# Altium PCB Sexy Rodent.PcbDoc (part 2 of 3)
Units mm, origin at the board's own origin, x right, y up, seen from the top; angles counter-clockwise.
Board outline 59.05 x 84.85 mm, 2 copper layers (Top Layer, Bottom Layer); 67 components, 41 nets, 178 pads, 206 vias.
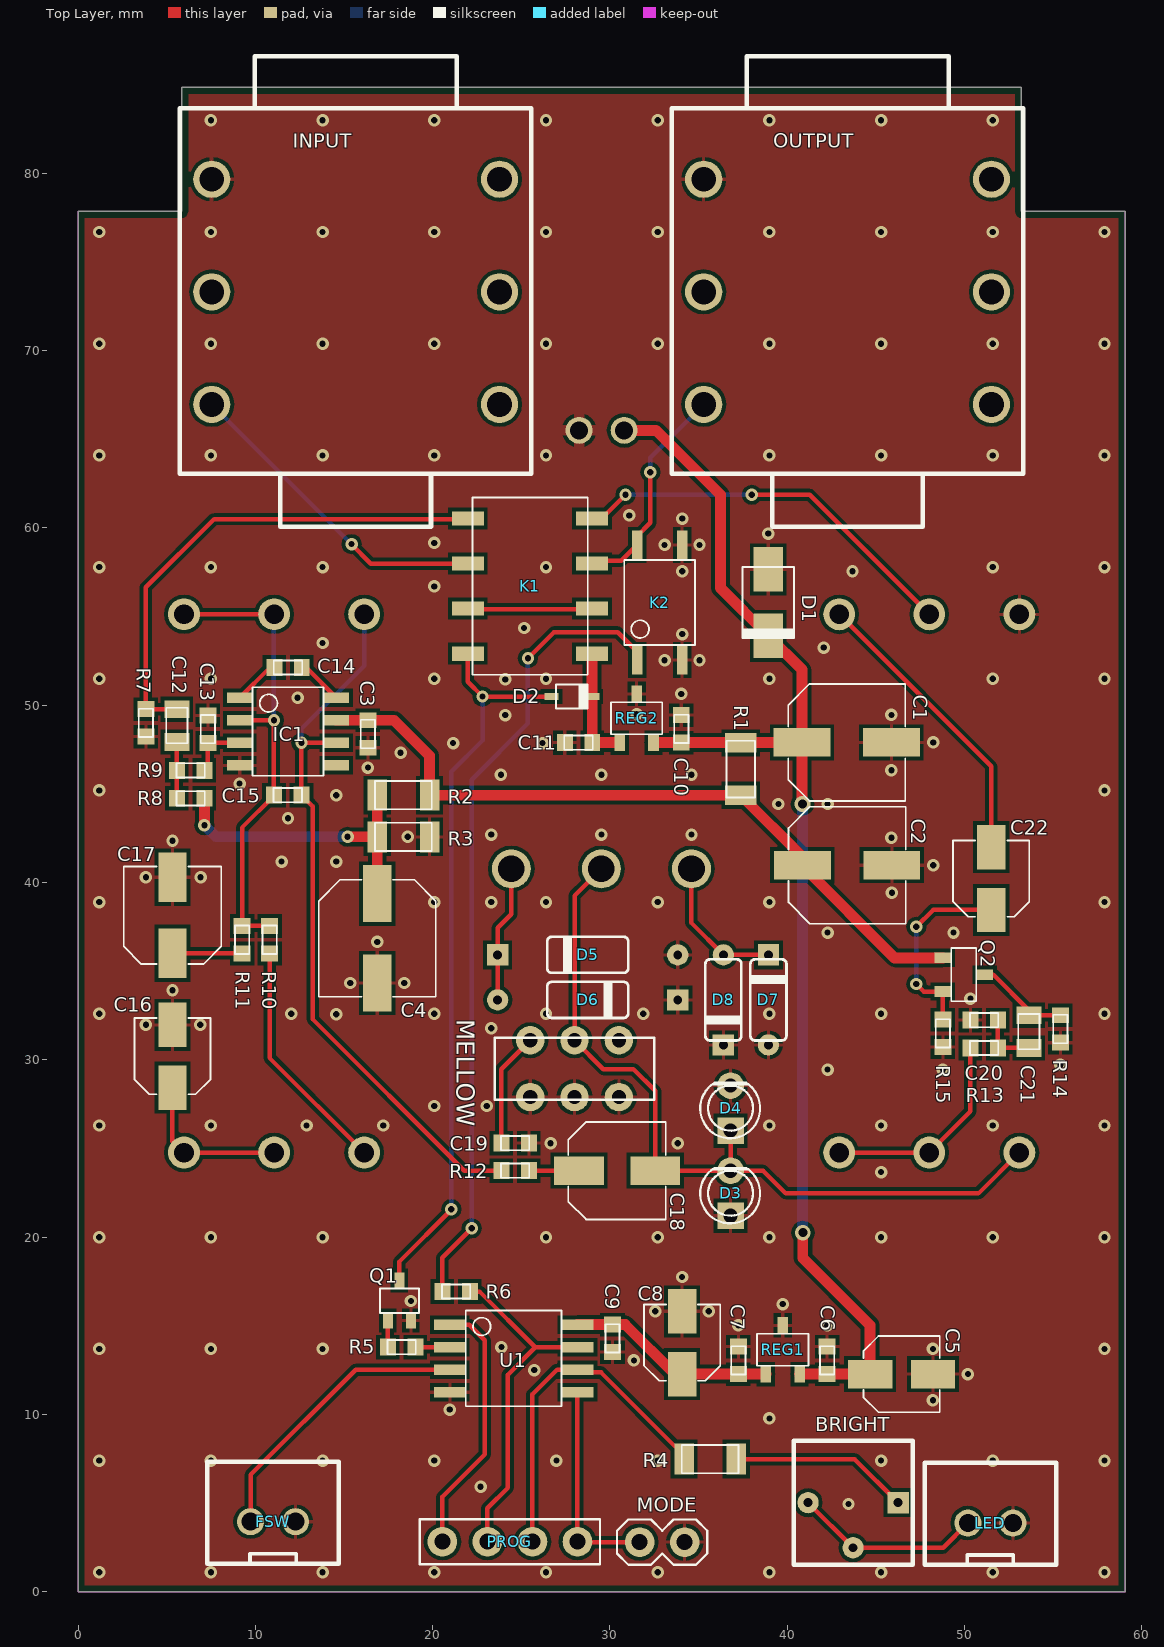
[diagram p0: Top Layer view]

## Part data (continued)
Q1: library part MMBT2222AWT1G, "TRANS NPN 40V 0.6A SOT323", Case/Package=SC, Collector Base Voltage (VCBO)=75V, Collector Emitter Breakdown Voltage=40V, Collector Emitter Saturation Voltage=1V, Current Rating=28A, Emitter Base Voltage (VEBO)=6V, Frequency=300MHz, Manufacturer="ON Semiconductor", Max Collector Current=600mA, Max Frequency=100MHz, Max Operating Temperature=150°C, Max Power Dissipation=150mW, Min Operating Temperature=-55°C, Package Quantity=1, Supplier Part Number 1=2317589, Collector Emitter Voltage (VCEO)=40V, ComponentLink1Description=https://datasheet.ciiva.com/15139/getdatasheetpartid-76779-15139056.pdf?src-supplier=Verical, ComponentLink1URL=https://datasheet.ciiva.com/15139/getdatasheetpartid-76779-15139056.pdf?src-supplier=Verical, ComponentLink2Description=https://datasheet.ciiva.com/4722/mmbt2222awt1-d-110211-4722257.pdf?src-supplier=Mouser, ComponentLink2URL=https://datasheet.ciiva.com/4722/mmbt2222awt1-d-110211-4722257.pdf?src-supplier=Mouser, ComponentLink3Description=https://datasheet.ciiva.com/16478/mmbt2222awt1-d-16478517.pdf?src-supplier=Avnet+Asia, ComponentLink3URL=https://datasheet.ciiva.com/16478/mmbt2222awt1-d-16478517.pdf?src-supplier=Avnet+Asia, ComponentLink4Description=https://datasheet.ciiva.com/11201/mmbt2222awt1-d-11201756.pdf?src-supplier=Avnet, ComponentLink4URL=https://datasheet.ciiva.com/11201/mmbt2222awt1-d-11201756.pdf?src-supplier=Avnet, ComponentLink5Description=https://datasheet.ciiva.com/16221/mmbt2222awt1-d-16221845.pdf?src-supplier=Future+Electronics, ComponentLink5URL=https://datasheet.ciiva.com/16221/mmbt2222awt1-d-16221845.pdf?src-supplier=Future+Electronics, ComponentLink6Description=https://datasheet.ciiva.com/7972/mmbt2222awt1-d-7972374.pdf?src-supplier=Element14, ComponentLink6URL=https://datasheet.ciiva.com/7972/mmbt2222awt1-d-7972374.pdf?src-supplier=Element14, ComponentLink7Description=https://datasheet.ciiva.com/22664/1708260-22664154.pdf?src-supplier=Element14, ComponentLink7URL=https://datasheet.ciiva.com/22664/1708260-22664154.pdf?src-supplier=Element14, ComponentLink8Description=https://datasheet.ciiva.com/976/mmbt2222awt1-d-976443.pdf?src-supplier=Digi-Key, ComponentLink8URL=https://datasheet.ciiva.com/976/mmbt2222awt1-d-976443.pdf?src-supplier=Digi-Key, Contact Plating=Tin, Element Configuration=Single, Gain Bandwidth Product=300MHz, Height=1mm, hFE Min=35, Lead Free="Lead Free", Length=2.2mm, Manufacturer Part Number=MMBT2222AWT1G, Max Breakdown Voltage=40V, Number of Elements=1, Number of Pins=3, Packaging="Tape and Reel", Polarity=NPN, Power Dissipation=150mW, Price=0.0413, Pricing="5=0.118, 50=0.114, 100=0.0413, 500=0.025, 1500=0.024 (EUR)", Radiation Hardening=No, REACH SVHC="No SVHC", RoHS=Yes, Stock=16918, Supplier 1=Farnell, Transition Frequency=300MHz, Voltage Rating (DC)=40V, Width=1.35mm
Q2: library part MMBFJ201, "JFET N-CH 40V 350MW SOT23", Breakdown Voltage=-40V, Case/Package=SOT-23, Continuous Drain Current (ID)=1mA, Current Rating=50mA, Drain to Source Voltage (Vdss)=40V, Manufacturer="ON Semiconductor / Fairchild", Max Operating Temperature=150°C, Max Power Dissipation=350mW, Min Operating Temperature=-55°C, Package Quantity=1, Supplier Part Number 1=2295758, ComponentLink1Description=https://datasheet.ciiva.com/960/mmbfj201-960915.pdf?src-supplier=Digi-Key, ComponentLink1URL=https://datasheet.ciiva.com/960/mmbfj201-960915.pdf?src-supplier=Digi-Key, ComponentLink2Description=https://datasheet.ciiva.com/1188/j201-1188339.pdf?src-supplier=Element14, ComponentLink2URL=https://datasheet.ciiva.com/1188/j201-1188339.pdf?src-supplier=Element14, ComponentLink3Description=https://datasheet.ciiva.com/960/mmbfj201-960916.pdf?src-supplier=Digi-Key, ComponentLink3URL=https://datasheet.ciiva.com/960/mmbfj201-960916.pdf?src-supplier=Digi-Key, ComponentLink4Description=https://datasheet.ciiva.com/1209/mmbfj201-1209636.pdf?src-supplier=Farnell, ComponentLink4URL=https://datasheet.ciiva.com/1209/mmbfj201-1209636.pdf?src-supplier=Farnell, ComponentLink5Description=https://datasheet.ciiva.com/960/mmbfj201-960917.pdf?src-supplier=Digi-Key, ComponentLink5URL=https://datasheet.ciiva.com/960/mmbfj201-960917.pdf?src-supplier=Digi-Key, ComponentLink6Description=https://datasheet.ciiva.com/8084/mmbfj201-8084197.pdf?src-supplier=Avnet, ComponentLink6URL=https://datasheet.ciiva.com/8084/mmbfj201-8084197.pdf?src-supplier=Avnet, ComponentLink7Description=https://datasheet.ciiva.com/8084/mmbfj201-8084198.pdf?src-supplier=Avnet, ComponentLink7URL=https://datasheet.ciiva.com/8084/mmbfj201-8084198.pdf?src-supplier=Avnet, ComponentLink8Description=https://datasheet.ciiva.com/4437/mmbfj201-196106-4437754.pdf?src-supplier=Mouser, ComponentLink8URL=https://datasheet.ciiva.com/4437/mmbfj201-196106-4437754.pdf?src-supplier=Mouser, ComponentLink9Description=https://datasheet.ciiva.com/15224/getdatasheetpartid-92710-15224267.pdf?src-supplier=Verical, ComponentLink9URL=https://datasheet.ciiva.com/15224/getdatasheetpartid-92710-15224267.pdf?src-supplier=Verical, ComponentLink10Description=https://datasheet.ciiva.com/26026/mmbfj201-26026604.pdf?src-supplier=Avnet+Europe, ComponentLink10URL=https://datasheet.ciiva.com/26026/mmbfj201-26026604.pdf?src-supplier=Avnet+Europe, ComponentLink11Description=https://datasheet.ciiva.com/16775/mmbfj201-16775887.pdf?src-supplier=Future+Electronics, ComponentLink11URL=https://datasheet.ciiva.com/16775/mmbfj201-16775887.pdf?src-supplier=Future+Electronics, Element Configuration=Single, Gate to Source Voltage (Vgs)=-40V, Height=0.93mm, Lead Free="Lead Free", Length=2.92mm, Manufacturer Part Number=MMBFJ201, Mount="Surface Mount", Number of Pins=3, Packaging="Tape and Reel", Power Dissipation=350mW, Pricing="5=0.271, 50=0.248, 100=0.134, 500=0.097, 1500=0.0905 (EUR)", Radiation Hardening=No, REACH SVHC="No SVHC", RoHS=Yes, Stock=814, Supplier 1=Farnell, Voltage Rating (DC)=40V, Weight=0.03g, Width=1.3mm
R1: library part CRCW120647R0FKEA, "RES SMD 47 OHM 1% 1/4W 1206", Case/Package=1206, Case Code (Metric)=3216, Manufacturer=Vishay, Max Operating Temperature=155°C, Max Power Dissipation=250mW, Min Operating Temperature=-55°C, Package Quantity=10, Supplier Part Number 1=1470017, Temperature Coefficient=100ppm/°C, Tolerance=1%, Voltage Rating=200V, Case Code (Imperial)=1206, ComponentLink1Description=https://datasheet.ciiva.com/11818/0900766b80d98b5e-11818252.pdf?src-supplier=RSComponents, ComponentLink1URL=https://datasheet.ciiva.com/11818/0900766b80d98b5e-11818252.pdf?src-supplier=RSComponents, ComponentLink2Description=https://datasheet.ciiva.com/2469/dcrcwe3-2469056.pdf?src-supplier=Digi-Key, ComponentLink2URL=https://datasheet.ciiva.com/2469/dcrcwe3-2469056.pdf?src-supplier=Digi-Key, ComponentLink3Description=https://datasheet.ciiva.com/16760/70201119-16760313.pdf?src-supplier=Allied+Electronics, ComponentLink3URL=https://datasheet.ciiva.com/16760/70201119-16760313.pdf?src-supplier=Allied+Electronics, ComponentLink4Description=https://datasheet.ciiva.com/9005/dcrcwe3-9005498.pdf?src-supplier=Avnet, ComponentLink4URL=https://datasheet.ciiva.com/9005/dcrcwe3-9005498.pdf?src-supplier=Avnet, ComponentLink5Description=https://datasheet.ciiva.com/2469/dcrcwe3-2469054.pdf?src-supplier=Digi-Key, ComponentLink5URL=https://datasheet.ciiva.com/2469/dcrcwe3-2469054.pdf?src-supplier=Digi-Key, ComponentLink6Description=https://datasheet.ciiva.com/9005/dcrcwe3-9005502.pdf?src-supplier=Avnet, ComponentLink6URL=https://datasheet.ciiva.com/9005/dcrcwe3-9005502.pdf?src-supplier=Avnet, ComponentLink7Description=https://datasheet.ciiva.com/16435/dcrcw-16435790.pdf?src-supplier=Future+Electronics, ComponentLink7URL=https://datasheet.ciiva.com/16435/dcrcw-16435790.pdf?src-supplier=Future+Electronics, ComponentLink8Description=https://datasheet.ciiva.com/16894/dcrcwe3-16894718.pdf?src-supplier=Avnet+Europe, ComponentLink8URL=https://datasheet.ciiva.com/16894/dcrcwe3-16894718.pdf?src-supplier=Avnet+Europe, ComponentLink9Description=https://datasheet.ciiva.com/7777/1697337-7777594.pdf?src-supplier=Element14, ComponentLink9URL=https://datasheet.ciiva.com/7777/1697337-7777594.pdf?src-supplier=Element14, ComponentLink10Description=https://datasheet.ciiva.com/15159/getdatasheetpartid-67741-15159676.pdf?src-supplier=Verical, ComponentLink10URL=https://datasheet.ciiva.com/15159/getdatasheetpartid-67741-15159676.pdf?src-supplier=Verical, ComponentLink11Description=https://datasheet.ciiva.com/2469/dcrcwe3-2469055.pdf?src-supplier=Digi-Key, ComponentLink11URL=https://datasheet.ciiva.com/2469/dcrcwe3-2469055.pdf?src-supplier=Digi-Key, Composition="Thick Film", Contact Plating=Tin, Depth=1.6mm, Features="Automotive AEC-Q200", Height=0.55mm, Lead Free="Lead Free", Length=3.2mm, Manufacturer Part Number=CRCW120647R0FKEA, Military Standard=Not, Mount="Surface Mount", Number of Terminations=2, Packaging="Tape and Reel", Power Rating=250mW, Price=0.0249, Pricing="10=0.0369, 100=0.0246, 500=0.0205, 1000=0.0135, 2500=0.0108 (EUR)", Radiation Hardening=No, REACH SVHC=Unknown, Resistance=47R, RoHS=Yes, Stock=90018, Supplier 1=Farnell, Termination=SMD/SMT, Voltage Rating (DC)=200V, Weight=0.000353oz, Width=0.063inch
R2 R3: library part CRCW1206100KFKEA, "RES SMD 100K OHM 1% 1/4W 1206", Case/Package=1206, Case Code (Metric)=3216, Manufacturer=Vishay, Max Operating Temperature=155°C, Max Power Dissipation=250mW, Min Operating Temperature=-55°C, Package Quantity=10, Resistance=100kR, Supplier Part Number 1=1469975, Temperature Coefficient=100ppm/°C, Tolerance=1%, Voltage Rating=200V, Case Code (Imperial)=1206, ComponentLink1Description=https://datasheet.ciiva.com/11810/0900766b80d98b5e-11810216.pdf?src-supplier=RSComponents, ComponentLink1URL=https://datasheet.ciiva.com/11810/0900766b80d98b5e-11810216.pdf?src-supplier=RSComponents, ComponentLink2Description=https://datasheet.ciiva.com/16761/70201119-16761385.pdf?src-supplier=Allied+Electronics, ComponentLink2URL=https://datasheet.ciiva.com/16761/70201119-16761385.pdf?src-supplier=Allied+Electronics, ComponentLink3Description=https://datasheet.ciiva.com/26316/fld-crcw-e3-data-en-26316474.pdf?src-supplier=Distrelec, ComponentLink3URL=https://datasheet.ciiva.com/26316/fld-crcw-e3-data-en-26316474.pdf?src-supplier=Distrelec, ComponentLink4Description=https://datasheet.ciiva.com/16514/dcrcwe3-16514731.pdf?src-supplier=Avnet+Asia, ComponentLink4URL=https://datasheet.ciiva.com/16514/dcrcwe3-16514731.pdf?src-supplier=Avnet+Asia, ComponentLink5Description=https://datasheet.ciiva.com/16773/70201119-16773804.pdf?src-supplier=Allied+Electronics, ComponentLink5URL=https://datasheet.ciiva.com/16773/70201119-16773804.pdf?src-supplier=Allied+Electronics, ComponentLink6Description=https://datasheet.ciiva.com/2468/dcrcwe3-2468653.pdf?src-supplier=Digi-Key, ComponentLink6URL=https://datasheet.ciiva.com/2468/dcrcwe3-2468653.pdf?src-supplier=Digi-Key, ComponentLink7Description=https://datasheet.ciiva.com/2468/dcrcwe3-2468654.pdf?src-supplier=Digi-Key, ComponentLink7URL=https://datasheet.ciiva.com/2468/dcrcwe3-2468654.pdf?src-supplier=Digi-Key, ComponentLink8Description=https://datasheet.ciiva.com/5551/dcrcwe3-109170-5551630.pdf?src-supplier=Mouser, ComponentLink8URL=https://datasheet.ciiva.com/5551/dcrcwe3-109170-5551630.pdf?src-supplier=Mouser, ComponentLink9Description=https://datasheet.ciiva.com/8979/dcrcwe3-8979854.pdf?src-supplier=Avnet, ComponentLink9URL=https://datasheet.ciiva.com/8979/dcrcwe3-8979854.pdf?src-supplier=Avnet, ComponentLink10Description=https://datasheet.ciiva.com/8979/dcrcwe3-8979855.pdf?src-supplier=Avnet, ComponentLink10URL=https://datasheet.ciiva.com/8979/dcrcwe3-8979855.pdf?src-supplier=Avnet, ComponentLink11Description=https://datasheet.ciiva.com/2468/dcrcwe3-2468652.pdf?src-supplier=Digi-Key, ComponentLink11URL=https://datasheet.ciiva.com/2468/dcrcwe3-2468652.pdf?src-supplier=Digi-Key, ComponentLink12Description=https://datasheet.ciiva.com/7777/1720486-7777612.pdf?src-supplier=Element14, ComponentLink12URL=https://datasheet.ciiva.com/7777/1720486-7777612.pdf?src-supplier=Element14, Composition="Thick Film", Contact Plating=Tin, Depth=1.6mm, Features="Automotive AEC-Q200", Height=0.55mm, Lead Free="Lead Free", Length=3.2mm, Manufacturer Part Number=CRCW1206100KFKEA, Military Standard=Not, Mount="Surface Mount", Number of Pins=2, Number of Terminations=2, Packaging="Tape and Reel", Power Rating=250mW, Price=0.0249, Pricing="10=0.0369, 100=0.0246, 500=0.0205, 1000=0.0135, 2500=0.0108 (EUR)", Radiation Hardening=No, REACH SVHC=Unknown, RoHS=Yes, Stock=99714, Supplier 1=Farnell, Termination=SMD/SMT, Voltage Rating (DC)=200V, Weight=0.000353oz, Width=0.063inch
R4: library part CRCW1206220RFKEA, "RES SMD 220 OHM 1% 1/4W 1206", Case/Package=1206, Case Code (Metric)=3216, Manufacturer=Vishay, Max Operating Temperature=155°C, Max Power Dissipation=250mW, Min Operating Temperature=-55°C, Package Quantity=10, Supplier Part Number 1=2139380, Temperature Coefficient=100ppm/°C, Tolerance=1%, Voltage Rating=200V, Case Code (Imperial)=1206, ComponentLink1Description=https://datasheet.ciiva.com/5550/dcrcwe3-109170-5550679.pdf?src-supplier=Mouser, ComponentLink1URL=https://datasheet.ciiva.com/5550/dcrcwe3-109170-5550679.pdf?src-supplier=Mouser, ComponentLink2Description=https://datasheet.ciiva.com/17166/dcrcwe3-17166378.pdf?src-supplier=Avnet+Europe, ComponentLink2URL=https://datasheet.ciiva.com/17166/dcrcwe3-17166378.pdf?src-supplier=Avnet+Europe, ComponentLink3Description=https://datasheet.ciiva.com/2515/dcrcwe3-2515580.pdf?src-supplier=Digi-Key, ComponentLink3URL=https://datasheet.ciiva.com/2515/dcrcwe3-2515580.pdf?src-supplier=Digi-Key, ComponentLink4Description=https://datasheet.ciiva.com/2515/dcrcwe3-2515581.pdf?src-supplier=Digi-Key, ComponentLink4URL=https://datasheet.ciiva.com/2515/dcrcwe3-2515581.pdf?src-supplier=Digi-Key, ComponentLink5Description=https://datasheet.ciiva.com/2515/dcrcwe3-2515582.pdf?src-supplier=Digi-Key, ComponentLink5URL=https://datasheet.ciiva.com/2515/dcrcwe3-2515582.pdf?src-supplier=Digi-Key, ComponentLink6Description=https://datasheet.ciiva.com/8957/dcrcwe3-8957438.pdf?src-supplier=Avnet, ComponentLink6URL=https://datasheet.ciiva.com/8957/dcrcwe3-8957438.pdf?src-supplier=Avnet, ComponentLink7Description=https://datasheet.ciiva.com/22700/1697337-22700367.pdf?src-supplier=Element14, ComponentLink7URL=https://datasheet.ciiva.com/22700/1697337-22700367.pdf?src-supplier=Element14, ComponentLink8Description=https://datasheet.ciiva.com/26317/fld-crcw-e3-data-en-26317129.pdf?src-supplier=Distrelec, ComponentLink8URL=https://datasheet.ciiva.com/26317/fld-crcw-e3-data-en-26317129.pdf?src-supplier=Distrelec, ComponentLink9Description=https://datasheet.ciiva.com/7800/dcrcwe3-7800651.pdf?src-supplier=Element14, ComponentLink9URL=https://datasheet.ciiva.com/7800/dcrcwe3-7800651.pdf?src-supplier=Element14, ComponentLink10Description=https://datasheet.ciiva.com/22675/1912744-22675103.pdf?src-supplier=Element14, ComponentLink10URL=https://datasheet.ciiva.com/22675/1912744-22675103.pdf?src-supplier=Element14, Composition="Thick Film", Contact Plating=Tin, Depth=1.6mm, Features="Automotive AEC-Q200", Height=0.55mm, Lead Free="Lead Free", Length=3.2mm, Manufacturer Part Number=CRCW1206220RFKEA, Military Standard=Not, Mount="Surface Mount", Number of Terminations=2, Packaging="Tape and Reel", Power Rating=250mW, Price=0.028, Pricing="10=0.0415, 100=0.0276, 500=0.0231, 1000=0.0135, 2500=0.0116 (EUR)", Radiation Hardening=No, REACH SVHC=Unknown, Resistance=220R, RoHS=Yes, Stock=47111, Supplier 1=Farnell, Termination=SMD/SMT, Voltage Rating (DC)=200V, Weight=0.000353oz, Width=1.6mm
R5: library part CRCW060320K0FKEA, "RES SMD 20K OHM 1% 1/10W 0603", Case/Package=0603, Case Code (Metric)=1608, Manufacturer=Vishay, Max Operating Temperature=155°C, Min Operating Temperature=-55°C, Package Quantity=5000, Power Rating=100mW, Resistance=20kR, Supplier Part Number 1=1469774, Temperature Coefficient=100ppm/°C, Tolerance=1%, Voltage Rating=75V, Case Code (Imperial)=0603, ComponentLink1Description=https://datasheet.ciiva.com/5549/dcrcwe3-109170-5549626.pdf?src-supplier=Mouser, ComponentLink1URL=https://datasheet.ciiva.com/5549/dcrcwe3-109170-5549626.pdf?src-supplier=Mouser, ComponentLink2Description=https://datasheet.ciiva.com/26314/fld-crcw-e3-data-en-26314665.pdf?src-supplier=Distrelec, ComponentLink2URL=https://datasheet.ciiva.com/26314/fld-crcw-e3-data-en-26314665.pdf?src-supplier=Distrelec, ComponentLink3Description=https://datasheet.ciiva.com/3257/dcrcwe3-3257238.pdf?src-supplier=Avnet, ComponentLink3URL=https://datasheet.ciiva.com/3257/dcrcwe3-3257238.pdf?src-supplier=Avnet, ComponentLink4Description=https://datasheet.ciiva.com/7841/1697337-7841574.pdf?src-supplier=Element14, ComponentLink4URL=https://datasheet.ciiva.com/7841/1697337-7841574.pdf?src-supplier=Element14, ComponentLink5Description=https://datasheet.ciiva.com/3257/dcrcwe3-3257239.pdf?src-supplier=Avnet, ComponentLink5URL=https://datasheet.ciiva.com/3257/dcrcwe3-3257239.pdf?src-supplier=Avnet, ComponentLink6Description=https://datasheet.ciiva.com/16351/dcrcwe3-16351112.pdf?src-supplier=Future+Electronics, ComponentLink6URL=https://datasheet.ciiva.com/16351/dcrcwe3-16351112.pdf?src-supplier=Future+Electronics, ComponentLink7Description=https://datasheet.ciiva.com/16893/dcrcw-16893852.pdf?src-supplier=Avnet+Europe, ComponentLink7URL=https://datasheet.ciiva.com/16893/dcrcw-16893852.pdf?src-supplier=Avnet+Europe, Composition="Thick Film", Contact Plating=Tin, Depth=0.85mm, Height=0.45mm, Lead Free="Lead Free", Length=1.55mm, Manufacturer Part Number=CRCW060320K0FKEA, Military Standard=Not, Mount="Surface Mount", Number of Pins=2, Packaging="Tape and Reel", Price=0.0131, Pricing="10=0.0169, 100=0.013, 500=0.0113, 1000=0.008 (EUR)", Radiation Hardening=No, REACH SVHC=Unknown, RoHS=Yes, Stock=71220, Supplier 1=Farnell, Termination=SMD/SMT, Voltage Rating (DC)=75V, Weight=7.1E-05oz, Width=0.85mm
R6 R9 R12: library part CRCW06031K00FKEA, "RES SMD 1K OHM 1% 1/10W 0603", Case/Package=0603, Case Code (Metric)=1608, Manufacturer="Vishay Dale", Max Operating Temperature=155°C, Max Power Dissipation=100mW, Min Operating Temperature=-55°C, Package Quantity=10, Resistance=1kR, Supplier Part Number 1=1469740, Temperature Coefficient=100ppm/°C, Tolerance=1%, Voltage Rating=75V, Case Code (Imperial)=0603, ComponentLink1Description=https://datasheet.ciiva.com/11808/0900766b80d98afc-11808625.pdf?src-supplier=RSComponents, ComponentLink1URL=https://datasheet.ciiva.com/11808/0900766b80d98afc-11808625.pdf?src-supplier=RSComponents, ComponentLink2Description=https://datasheet.ciiva.com/2465/dcrcwe3-2465536.pdf?src-supplier=Digi-Key, ComponentLink2URL=https://datasheet.ciiva.com/2465/dcrcwe3-2465536.pdf?src-supplier=Digi-Key, ComponentLink3Description=https://datasheet.ciiva.com/8336/dcrcwe3-8336822.pdf?src-supplier=Avnet, ComponentLink3URL=https://datasheet.ciiva.com/8336/dcrcwe3-8336822.pdf?src-supplier=Avnet, ComponentLink4Description=https://datasheet.ciiva.com/16515/dcrcwe3-16515078.pdf?src-supplier=Avnet+Asia, ComponentLink4URL=https://datasheet.ciiva.com/16515/dcrcwe3-16515078.pdf?src-supplier=Avnet+Asia, ComponentLink5Description=https://datasheet.ciiva.com/46441/1720486-46441622.pdf?src-supplier=Element14, ComponentLink5URL=https://datasheet.ciiva.com/46441/1720486-46441622.pdf?src-supplier=Element14, ComponentLink6Description=https://datasheet.ciiva.com/26316/fld-crcw-e3-data-en-26316551.pdf?src-supplier=Distrelec, ComponentLink6URL=https://datasheet.ciiva.com/26316/fld-crcw-e3-data-en-26316551.pdf?src-supplier=Distrelec, ComponentLink7Description=https://datasheet.ciiva.com/46441/1720486-46441623.pdf?src-supplier=Element14, ComponentLink7URL=https://datasheet.ciiva.com/46441/1720486-46441623.pdf?src-supplier=Element14, ComponentLink8Description=https://datasheet.ciiva.com/46385/1697337-46385497.pdf?src-supplier=Element14, ComponentLink8URL=https://datasheet.ciiva.com/46385/1697337-46385497.pdf?src-supplier=Element14, ComponentLink9Description=https://datasheet.ciiva.com/3257/dcrcwe3-3257132.pdf?src-supplier=Avnet, ComponentLink9URL=https://datasheet.ciiva.com/3257/dcrcwe3-3257132.pdf?src-supplier=Avnet, ComponentLink10Description=https://datasheet.ciiva.com/16199/dcrcwe3-16199053.pdf?src-supplier=Future+Electronics, ComponentLink10URL=https://datasheet.ciiva.com/16199/dcrcwe3-16199053.pdf?src-supplier=Future+Electronics, ComponentLink11Description=https://datasheet.ciiva.com/2465/dcrcwe3-2465534.pdf?src-supplier=Digi-Key, ComponentLink11URL=https://datasheet.ciiva.com/2465/dcrcwe3-2465534.pdf?src-supplier=Digi-Key, ComponentLink12Description=https://datasheet.ciiva.com/16893/dcrcwe3-16893742.pdf?src-supplier=Avnet+Europe, ComponentLink12URL=https://datasheet.ciiva.com/16893/dcrcwe3-16893742.pdf?src-supplier=Avnet+Europe, ComponentLink13Description=https://datasheet.ciiva.com/2465/dcrcwe3-2465535.pdf?src-supplier=Digi-Key, ComponentLink13URL=https://datasheet.ciiva.com/2465/dcrcwe3-2465535.pdf?src-supplier=Digi-Key, Composition="Thick Film", Contact Plating=Tin, Depth=0.85mm, Features="Automotive AEC-Q200", Height=0.45mm, Lead Free="Lead Free", Length=1.55mm, Manufacturer Part Number=CRCW06031K00FKEA, Military Standard=Not, Mount="Surface Mount", Number of Pins=2, Number of Terminations=2, Packaging="Tape and Reel", Power Rating=100mW, Price=0.013, Pricing="10=0.017, 100=0.0131, 500=0.0114, 1000=0.008, 2500=0.0061 (EUR)", Radiation Hardening=No, REACH SVHC=Unknown, RoHS=Yes, Stock=1083345, Supplier 1=Farnell, Termination=SMD/SMT, Voltage Rating (DC)=75V, Weight=7.1E-05oz, Width=0.033inch
R7 R8: library part CRCW06032M20FKEA, "RES SMD 2.2M OHM 1% 1/10W 0603", Case/Package=0603, Case Code (Metric)=1608, Manufacturer=Vishay, Max Operating Temperature=155°C, Max Power Dissipation=100mW, Min Operating Temperature=-55°C, Package Quantity=10, Resistance=2.2MR, Supplier Part Number 1=2138646, Temperature Coefficient=100ppm/°C, Tolerance=1%, Voltage Rating=75V, Case Code (Imperial)=0603, ComponentLink1Description=https://datasheet.ciiva.com/11810/0900766b80d98afc-11810588.pdf?src-supplier=RSComponents, ComponentLink1URL=https://datasheet.ciiva.com/11810/0900766b80d98afc-11810588.pdf?src-supplier=RSComponents, ComponentLink2Description=https://datasheet.ciiva.com/2466/dcrcwe3-2466118.pdf?src-supplier=Digi-Key, ComponentLink2URL=https://datasheet.ciiva.com/2466/dcrcwe3-2466118.pdf?src-supplier=Digi-Key, ComponentLink3Description=https://datasheet.ciiva.com/22682/1912744-22682662.pdf?src-supplier=Element14, ComponentLink3URL=https://datasheet.ciiva.com/22682/1912744-22682662.pdf?src-supplier=Element14, ComponentLink4Description=https://datasheet.ciiva.com/7801/1697337-7801067.pdf?src-supplier=Element14, ComponentLink4URL=https://datasheet.ciiva.com/7801/1697337-7801067.pdf?src-supplier=Element14, ComponentLink5Description=https://datasheet.ciiva.com/22869/70201119-22869819.pdf?src-supplier=Allied+Electronics, ComponentLink5URL=https://datasheet.ciiva.com/22869/70201119-22869819.pdf?src-supplier=Allied+Electronics, ComponentLink6Description=https://datasheet.ciiva.com/26314/fld-crcw-e3-data-en-26314653.pdf?src-supplier=Distrelec, ComponentLink6URL=https://datasheet.ciiva.com/26314/fld-crcw-e3-data-en-26314653.pdf?src-supplier=Distrelec, ComponentLink7Description=https://datasheet.ciiva.com/3257/dcrcwe3-3257407.pdf?src-supplier=Avnet, ComponentLink7URL=https://datasheet.ciiva.com/3257/dcrcwe3-3257407.pdf?src-supplier=Avnet, ComponentLink8Description=https://datasheet.ciiva.com/2466/dcrcwe3-2466116.pdf?src-supplier=Digi-Key, ComponentLink8URL=https://datasheet.ciiva.com/2466/dcrcwe3-2466116.pdf?src-supplier=Digi-Key, ComponentLink9Description=https://datasheet.ciiva.com/2466/dcrcwe3-2466117.pdf?src-supplier=Digi-Key, ComponentLink9URL=https://datasheet.ciiva.com/2466/dcrcwe3-2466117.pdf?src-supplier=Digi-Key, ComponentLink10Description=https://datasheet.ciiva.com/16498/dcrcwe3-16498313.pdf?src-supplier=Future+Electronics, ComponentLink10URL=https://datasheet.ciiva.com/16498/dcrcwe3-16498313.pdf?src-supplier=Future+Electronics, ComponentLink11Description=https://datasheet.ciiva.com/7801/1697337-7801066.pdf?src-supplier=Element14, ComponentLink11URL=https://datasheet.ciiva.com/7801/1697337-7801066.pdf?src-supplier=Element14, Composition="Thick Film", Contact Plating=Tin, Depth=0.85mm, Features="Automotive AEC-Q200", Height=0.45mm, Lead Free="Lead Free", Length=1.55mm, Manufacturer Part Number=CRCW06032M20FKEA, Military Standard=Not, Mount="Surface Mount", Number of Pins=2, Number of Terminations=2, Packaging="Tape and Reel", Power Rating=100mW, Price=0.0165, Pricing="10=0.0212, 100=0.0163, 500=0.0141, 1000=0.0073 (EUR)", Radiation Hardening=No, REACH SVHC=Unknown, RoHS=Yes, Stock=19125, Supplier 1=Farnell, Termination=SMD/SMT, Voltage Rating (DC)=75V, Weight=7.1E-05oz, Width=0.85mm
R10: library part CRCW060347R0FKEA, "RES SMD 47 OHM 1% 1/10W 0603", Case/Package=0603, Case Code (Metric)=1608, Manufacturer=Vishay, Max Operating Temperature=155°C, Max Power Dissipation=100mW, Min Operating Temperature=-55°C, Package Quantity=10, Supplier Part Number 1=2141241, Temperature Coefficient=100ppm/°C, Tolerance=1%, Voltage Rating=75V, Case Code (Imperial)=0603, ComponentLink1Description=https://datasheet.ciiva.com/11810/0900766b80d98afc-11810171.pdf?src-supplier=RSComponents, ComponentLink1URL=https://datasheet.ciiva.com/11810/0900766b80d98afc-11810171.pdf?src-supplier=RSComponents, ComponentLink2Description=https://datasheet.ciiva.com/3257/dcrcwe3-3257637.pdf?src-supplier=Avnet, ComponentLink2URL=https://datasheet.ciiva.com/3257/dcrcwe3-3257637.pdf?src-supplier=Avnet, ComponentLink3Description=https://datasheet.ciiva.com/7777/1697337-7777333.pdf?src-supplier=Element14, ComponentLink3URL=https://datasheet.ciiva.com/7777/1697337-7777333.pdf?src-supplier=Element14, ComponentLink4Description=https://datasheet.ciiva.com/22872/70201119-22872069.pdf?src-supplier=Allied+Electronics, ComponentLink4URL=https://datasheet.ciiva.com/22872/70201119-22872069.pdf?src-supplier=Allied+Electronics, ComponentLink5Description=https://datasheet.ciiva.com/2465/dcrcwe3-2465675.pdf?src-supplier=Digi-Key, ComponentLink5URL=https://datasheet.ciiva.com/2465/dcrcwe3-2465675.pdf?src-supplier=Digi-Key, ComponentLink6Description=https://datasheet.ciiva.com/2465/dcrcwe3-2465676.pdf?src-supplier=Digi-Key, ComponentLink6URL=https://datasheet.ciiva.com/2465/dcrcwe3-2465676.pdf?src-supplier=Digi-Key, ComponentLink7Description=https://datasheet.ciiva.com/5549/dcrcwe3-109170-5549100.pdf?src-supplier=Mouser, ComponentLink7URL=https://datasheet.ciiva.com/5549/dcrcwe3-109170-5549100.pdf?src-supplier=Mouser, ComponentLink8Description=https://datasheet.ciiva.com/7777/1697337-7777334.pdf?src-supplier=Element14, ComponentLink8URL=https://datasheet.ciiva.com/7777/1697337-7777334.pdf?src-supplier=Element14, ComponentLink9Description=https://datasheet.ciiva.com/16777/70201119-16777404.pdf?src-supplier=Allied+Electronics, ComponentLink9URL=https://datasheet.ciiva.com/16777/70201119-16777404.pdf?src-supplier=Allied+Electronics, ComponentLink10Description=https://datasheet.ciiva.com/22700/1697337-22700364.pdf?src-supplier=Element14, ComponentLink10URL=https://datasheet.ciiva.com/22700/1697337-22700364.pdf?src-supplier=Element14, ComponentLink11Description=https://datasheet.ciiva.com/2465/dcrcwe3-2465677.pdf?src-supplier=Digi-Key, ComponentLink11URL=https://datasheet.ciiva.com/2465/dcrcwe3-2465677.pdf?src-supplier=Digi-Key, ComponentLink12Description=https://datasheet.ciiva.com/26316/fld-crcw-e3-data-en-26316558.pdf?src-supplier=Distrelec, ComponentLink12URL=https://datasheet.ciiva.com/26316/fld-crcw-e3-data-en-26316558.pdf?src-supplier=Distrelec, Composition="Thick Film", Contact Plating=Tin, Depth=0.85mm, Features="Automotive AEC-Q200", Height=0.45mm, Lead Free="Lead Free", Length=1.55mm, Manufacturer Part Number=CRCW060347R0FKEA, Military Standard=Not, Mount="Surface Mount", Number of Pins=2, Number of Terminations=2, Packaging="Tape and Reel", Power Rating=100mW, Price=0.0128, Pricing="10=0.0169, 100=0.013, 500=0.0113, 1000=0.0074 (EUR)", Radiation Hardening=No, REACH SVHC=Unknown, Resistance=47R, RoHS=Yes, Stock=39123, Supplier 1=Farnell, Termination=SMD/SMT, Voltage Rating (DC)=75V, Weight=7.1E-05oz, Width=0.033inch
R11: library part CRCW0603560RFKEA, "RES SMD 560 OHM 1% 1/10W 0603", Case/Package=0603, Case Code (Metric)=1608, Manufacturer=Vishay, Max Operating Temperature=155°C, Max Power Dissipation=100mW, Min Operating Temperature=-55°C, Package Quantity=5000, Supplier Part Number 1=1469828, Temperature Coefficient=100ppm/°C, Tolerance=1%, Voltage Rating=75V, Case Code (Imperial)=0603, ComponentLink1Description=https://datasheet.ciiva.com/11809/0900766b80d98afc-11809740.pdf?src-supplier=RSComponents, ComponentLink1URL=https://datasheet.ciiva.com/11809/0900766b80d98afc-11809740.pdf?src-supplier=RSComponents, ComponentLink2Description=https://datasheet.ciiva.com/2465/dcrcwe3-2465987.pdf?src-supplier=Digi-Key, ComponentLink2URL=https://datasheet.ciiva.com/2465/dcrcwe3-2465987.pdf?src-supplier=Digi-Key, ComponentLink3Description=https://datasheet.ciiva.com/2465/dcrcwe3-2465988.pdf?src-supplier=Digi-Key, ComponentLink3URL=https://datasheet.ciiva.com/2465/dcrcwe3-2465988.pdf?src-supplier=Digi-Key, ComponentLink4Description=https://datasheet.ciiva.com/2465/dcrcwe3-2465989.pdf?src-supplier=Digi-Key, ComponentLink4URL=https://datasheet.ciiva.com/2465/dcrcwe3-2465989.pdf?src-supplier=Digi-Key, ComponentLink5Description=https://datasheet.ciiva.com/16884/dcrcwe3-16884725.pdf?src-supplier=Avnet+Europe, ComponentLink5URL=https://datasheet.ciiva.com/16884/dcrcwe3-16884725.pdf?src-supplier=Avnet+Europe, ComponentLink6Description=https://datasheet.ciiva.com/22868/70201119-22868967.pdf?src-supplier=Allied+Electronics, ComponentLink6URL=https://datasheet.ciiva.com/22868/70201119-22868967.pdf?src-supplier=Allied+Electronics, ComponentLink7Description=https://datasheet.ciiva.com/7673/1697337-7673147.pdf?src-supplier=Element14, ComponentLink7URL=https://datasheet.ciiva.com/7673/1697337-7673147.pdf?src-supplier=Element14, ComponentLink8Description=https://datasheet.ciiva.com/5543/dcrcwe3-109170-5543470.pdf?src-supplier=Mouser, ComponentLink8URL=https://datasheet.ciiva.com/5543/dcrcwe3-109170-5543470.pdf?src-supplier=Mouser, ComponentLink9Description=https://datasheet.ciiva.com/3257/dcrcwe3-3257727.pdf?src-supplier=Avnet, ComponentLink9URL=https://datasheet.ciiva.com/3257/dcrcwe3-3257727.pdf?src-supplier=Avnet, ComponentLink10Description=https://datasheet.ciiva.com/7672/1697337-7672911.pdf?src-supplier=Element14, ComponentLink10URL=https://datasheet.ciiva.com/7672/1697337-7672911.pdf?src-supplier=Element14, Composition="Thick Film", Contact Plating=Tin, Depth=0.85mm, Features="Automotive AEC-Q200", Height=0.45mm, Lead Free="Lead Free", Length=1.55mm, Manufacturer Part Number=CRCW0603560RFKEA, Military Standard=Not, Mount="Surface Mount", Number of Pins=2, Number of Terminations=2, Packaging="Tape and Reel", Power Rating=100mW, Price=0.0093, Pricing="10=0.0112, 100=0.0092, 500=0.0084, 1000=0.0075 (EUR)", Radiation Hardening=No, REACH SVHC=Unknown, Resistance=560R, RoHS=Yes, Stock=54378, Supplier 1=Farnell, Termination=SMD/SMT, Voltage Rating (DC)=75V, Weight=7.1E-05oz, Width=0.033inch
R13: library part CRCW06031K50FKEA, "RES SMD 1.5K OHM 1% 1/10W 0603", Case/Package=0603, Case Code (Metric)=1608, Manufacturer=Vishay, Max Operating Temperature=155°C, Max Power Dissipation=100mW, Min Operating Temperature=-55°C, Package Quantity=10, Resistance=1.5kR, Supplier Part Number 1=1469743, Temperature Coefficient=100ppm/°C, Tolerance=1%, Voltage Rating=75V, Case Code (Imperial)=0603, ComponentLink1Description=https://datasheet.ciiva.com/11818/0900766b80d98afc-11818140.pdf?src-supplier=RSComponents, ComponentLink1URL=https://datasheet.ciiva.com/11818/0900766b80d98afc-11818140.pdf?src-supplier=RSComponents, ComponentLink2Description=https://datasheet.ciiva.com/2465/dcrcwe3-2465520.pdf?src-supplier=Digi-Key, ComponentLink2URL=https://datasheet.ciiva.com/2465/dcrcwe3-2465520.pdf?src-supplier=Digi-Key, ComponentLink3Description=https://datasheet.ciiva.com/16724/70201119-16724086.pdf?src-supplier=Allied+Electronics, ComponentLink3URL=https://datasheet.ciiva.com/16724/70201119-16724086.pdf?src-supplier=Allied+Electronics, ComponentLink4Description=https://datasheet.ciiva.com/16883/dcrcwe3-16883174.pdf?src-supplier=Avnet+Europe, ComponentLink4URL=https://datasheet.ciiva.com/16883/dcrcwe3-16883174.pdf?src-supplier=Avnet+Europe, ComponentLink5Description=https://datasheet.ciiva.com/5544/dcrcwe3-109170-5544539.pdf?src-supplier=Mouser, ComponentLink5URL=https://datasheet.ciiva.com/5544/dcrcwe3-109170-5544539.pdf?src-supplier=Mouser, ComponentLink6Description=https://datasheet.ciiva.com/7777/1720486-7777550.pdf?src-supplier=Element14, ComponentLink6URL=https://datasheet.ciiva.com/7777/1720486-7777550.pdf?src-supplier=Element14, ComponentLink7Description=https://datasheet.ciiva.com/2465/dcrcwe3-2465519.pdf?src-supplier=Digi-Key, ComponentLink7URL=https://datasheet.ciiva.com/2465/dcrcwe3-2465519.pdf?src-supplier=Digi-Key, ComponentLink8Description=https://datasheet.ciiva.com/2465/dcrcwe3-2465521.pdf?src-supplier=Digi-Key, ComponentLink8URL=https://datasheet.ciiva.com/2465/dcrcwe3-2465521.pdf?src-supplier=Digi-Key, ComponentLink9Description=https://datasheet.ciiva.com/16199/dcrcwe3-16199429.pdf?src-supplier=Future+Electronics, ComponentLink9URL=https://datasheet.ciiva.com/16199/dcrcwe3-16199429.pdf?src-supplier=Future+Electronics, ComponentLink10Description=https://datasheet.ciiva.com/26316/fld-crcw-e3-data-en-26316555.pdf?src-supplier=Distrelec, ComponentLink10URL=https://datasheet.ciiva.com/26316/fld-crcw-e3-data-en-26316555.pdf?src-supplier=Distrelec, Composition="Thick Film", Contact Plating=Tin, Depth=0.85mm, Features="Automotive AEC-Q200", Height=0.45mm, Lead Free="Lead Free", Length=1.55mm, Manufacturer Part Number=CRCW06031K50FKEA, Military Standard=Not, Mount="Surface Mount", Number of Terminations=2, Packaging="Tape and Reel", Power Rating=100mW, Price=0.0129, Pricing="10=0.017, 100=0.0131, 500=0.0114, 1000=0.008 (EUR)", REACH SVHC=Unknown, RoHS=Yes, Stock=115131, Supplier 1=Farnell, Termination=SMD/SMT, Voltage Rating (DC)=75V, Weight=7.1E-05oz, Width=0.033inch, Working Voltage=75V
R14: library part CRCW06031M00FKEA, "RES SMD 1M OHM 1% 1/10W 0603", Case/Package=0603, Case Code (Metric)=1608, Manufacturer=Vishay, Max Operating Temperature=155°C, Max Power Dissipation=100mW, Min Operating Temperature=-55°C, Package Quantity=10, Resistance=1MR, Supplier Part Number 1=1469746, Temperature Coefficient=100ppm/°C, Tolerance=1%, Voltage Rating=75V, Case Code (Imperial)=0603, ComponentLink1Description=https://datasheet.ciiva.com/11809/0900766b80d98afc-11809074.pdf?src-supplier=RSComponents, ComponentLink1URL=https://datasheet.ciiva.com/11809/0900766b80d98afc-11809074.pdf?src-supplier=RSComponents, ComponentLink2Description=https://datasheet.ciiva.com/26314/fld-crcw-e3-data-en-26314645.pdf?src-supplier=Distrelec, ComponentLink2URL=https://datasheet.ciiva.com/26314/fld-crcw-e3-data-en-26314645.pdf?src-supplier=Distrelec, ComponentLink3Description=https://datasheet.ciiva.com/2465/dcrcwe3-2465549.pdf?src-supplier=Digi-Key, ComponentLink3URL=https://datasheet.ciiva.com/2465/dcrcwe3-2465549.pdf?src-supplier=Digi-Key, ComponentLink4Description=https://datasheet.ciiva.com/16311/dcrcwe3-16311533.pdf?src-supplier=Future+Electronics, ComponentLink4URL=https://datasheet.ciiva.com/16311/dcrcwe3-16311533.pdf?src-supplier=Future+Electronics, ComponentLink5Description=https://datasheet.ciiva.com/2465/dcrcwe3-2465550.pdf?src-supplier=Digi-Key, ComponentLink5URL=https://datasheet.ciiva.com/2465/dcrcwe3-2465550.pdf?src-supplier=Digi-Key, ComponentLink6Description=https://datasheet.ciiva.com/7841/1720486-7841822.pdf?src-supplier=Element14, ComponentLink6URL=https://datasheet.ciiva.com/7841/1720486-7841822.pdf?src-supplier=Element14, ComponentLink7Description=https://datasheet.ciiva.com/2465/dcrcwe3-2465551.pdf?src-supplier=Digi-Key, ComponentLink7URL=https://datasheet.ciiva.com/2465/dcrcwe3-2465551.pdf?src-supplier=Digi-Key, ComponentLink8Description=https://datasheet.ciiva.com/7841/125364-7841823.pdf?src-supplier=Element14, ComponentLink8URL=https://datasheet.ciiva.com/7841/125364-7841823.pdf?src-supplier=Element14, Composition="Thick Film", Contact Plating=Tin, Depth=0.85mm, Features="Automotive AEC-Q200", Height=0.45mm, Lead Free="Lead Free", Length=1.55mm, Manufacturer Part Number=CRCW06031M00FKEA, Military Standard=Not, Mount="Surface Mount", Number of Pins=2, Number of Terminations=2, Packaging="Tape and Reel", Power Rating=100mW, Price=0.0131, Pricing="10=0.0169, 100=0.013, 500=0.0113, 1000=0.008 (EUR)", Radiation Hardening=No, REACH SVHC=Unknown, RoHS=Yes, Stock=118520, Supplier 1=Farnell, Termination=SMD/SMT, Voltage Rating (DC)=75V, Weight=7.1E-05oz, Width=0.85mm
R15: library part CRCW060310K0FKEA, "RES SMD 10K OHM 1% 1/10W 0603", Case/Package=0603, Case Code (Metric)=1608, Manufacturer=Vishay, Max Operating Temperature=155°C, Max Power Dissipation=100mW, Min Operating Temperature=-55°C, Package Quantity=10, Resistance=10kR, Supplier Part Number 1=1469748, Temperature Coefficient=100ppm/°C, Tolerance=1%, Voltage Rating=75V, Case Code (Imperial)=0603, ComponentLink1Description=https://datasheet.ciiva.com/11809/0900766b80d98afc-11809037.pdf?src-supplier=RSComponents, ComponentLink1URL=https://datasheet.ciiva.com/11809/0900766b80d98afc-11809037.pdf?src-supplier=RSComponents, ComponentLink2Description=https://datasheet.ciiva.com/16886/dcrcw-16886037.pdf?src-supplier=Avnet+Europe, ComponentLink2URL=https://datasheet.ciiva.com/16886/dcrcw-16886037.pdf?src-supplier=Avnet+Europe, ComponentLink3Description=https://datasheet.ciiva.com/26821/getdatasheetpartid-86831-26821109.pdf?src-supplier=Verical, ComponentLink3URL=https://datasheet.ciiva.com/26821/getdatasheetpartid-86831-26821109.pdf?src-supplier=Verical, ComponentLink4Description=https://datasheet.ciiva.com/16754/70201119-16754710.pdf?src-supplier=Allied+Electronics, ComponentLink4URL=https://datasheet.ciiva.com/16754/70201119-16754710.pdf?src-supplier=Allied+Electronics, ComponentLink5Description=https://datasheet.ciiva.com/16719/70201119-16719704.pdf?src-supplier=Allied+Electronics, ComponentLink5URL=https://datasheet.ciiva.com/16719/70201119-16719704.pdf?src-supplier=Allied+Electronics, ComponentLink6Description=https://datasheet.ciiva.com/2465/dcrcwe3-2465513.pdf?src-supplier=Digi-Key, ComponentLink6URL=https://datasheet.ciiva.com/2465/dcrcwe3-2465513.pdf?src-supplier=Digi-Key, ComponentLink7Description=https://datasheet.ciiva.com/5543/dcrcwe3-109170-5543001.pdf?src-supplier=Mouser, ComponentLink7URL=https://datasheet.ciiva.com/5543/dcrcwe3-109170-5543001.pdf?src-supplier=Mouser, ComponentLink8Description=https://datasheet.ciiva.com/2465/dcrcwe3-2465514.pdf?src-supplier=Digi-Key, ComponentLink8URL=https://datasheet.ciiva.com/2465/dcrcwe3-2465514.pdf?src-supplier=Digi-Key, ComponentLink9Description=https://datasheet.ciiva.com/46385/1697337-46385498.pdf?src-supplier=Element14, ComponentLink9URL=https://datasheet.ciiva.com/46385/1697337-46385498.pdf?src-supplier=Element14, ComponentLink10Description=https://datasheet.ciiva.com/2465/dcrcwe3-2465515.pdf?src-supplier=Digi-Key, ComponentLink10URL=https://datasheet.ciiva.com/2465/dcrcwe3-2465515.pdf?src-supplier=Digi-Key, ComponentLink11Description=https://datasheet.ciiva.com/3256/dcrcwe3-3256939.pdf?src-supplier=Avnet, ComponentLink11URL=https://datasheet.ciiva.com/3256/dcrcwe3-3256939.pdf?src-supplier=Avnet, ComponentLink12Description=https://datasheet.ciiva.com/3256/dcrcwe3-3256940.pdf?src-supplier=Avnet, ComponentLink12URL=https://datasheet.ciiva.com/3256/dcrcwe3-3256940.pdf?src-supplier=Avnet, ComponentLink13Description=https://datasheet.ciiva.com/16209/dcrcwe3-16209164.pdf?src-supplier=Future+Electronics, ComponentLink13URL=https://datasheet.ciiva.com/16209/dcrcwe3-16209164.pdf?src-supplier=Future+Electronics, ComponentLink14Description=https://datasheet.ciiva.com/26314/fld-crcw-e3-data-en-26314749.pdf?src-supplier=Distrelec, ComponentLink14URL=https://datasheet.ciiva.com/26314/fld-crcw-e3-data-en-26314749.pdf?src-supplier=Distrelec, Composition="Thick Film", Contact Plating=Tin, Depth=0.85mm, Features="Automotive AEC-Q200", Height=0.45mm, Lead Free="Lead Free", Length=1.55mm, Manufacturer Part Number=CRCW060310K0FKEA, Military Standard=Not, Number of Pins=2, Number of Terminations=2, Packaging="Tape and Reel", Power Rating=100mW, Price=0.0131, Pricing="10=0.0169, 100=0.013, 500=0.0113, 1000=0.008 (EUR)", Radiation Hardening=No, REACH SVHC=Unknown, RoHS=Yes, Stock=1391124, Supplier 1=Farnell, Termination=SMD/SMT, Voltage Rating (DC)=75V, Weight=7.1E-05oz, Width=0.033inch
REG1 REG2: library part TS78L05CXRFG, "TAIWAN SEMICONDUCTOR - TS78L05CX RFG - REG 3-TERMINAL 100MA, SMD, SOT23-3", Case/Package=SOT-23, Manufacturer="Taiwan Semiconductor", Max Input Voltage=35V, Max Operating Temperature=125°C, Min Input Voltage=0uV, Min Operating Temperature=0°C, Nominal Output Voltage=5V, Output Current=100mA, Supplier Part Number 1=1476698, ComponentLink1Description=http://www.farnell.com/datasheets/2044138.pdf?src-supplier=Farnell, ComponentLink1URL=http://www.farnell.com/datasheets/2044138.pdf?src-supplier=Farnell, ComponentLink2Description=http://www.farnell.com/datasheets/4546.pdf?src-supplier=Element14, ComponentLink2URL=http://www.farnell.com/datasheets/4546.pdf?src-supplier=Element14, ComponentLink3Description=http://www.taiwansemi.com/products/datasheet/TS78L00_I15.pdf?src-supplier=Digi-Key, ComponentLink3URL=http://www.taiwansemi.com/products/datasheet/TS78L00_I15.pdf?src-supplier=Digi-Key, Manufacturer Part Number=TS78L05CXRFG, Number of Outputs=1, Number of Pins=3, Packaging="Cut Tape", Price=0.262, Pricing="5=0.101, 50=0.099, 100=0.097, 250=0.0949, 500=0.0929, 1000=0.0909, 5000=0.0889, 10000=0.0869 (EUR)", REACH SVHC="No SVHC", RoHS=Yes, Stock=0, Supplier 1=Farnell
SW1: library part SW_SPDT_ON-OFF-ON, "SPDT toggle switch ON/OFF/ON", Price=0.5
SWEEP: library part POT_1kB_ALPHA_16mm, "1k Lin potentiometer round shaft", Package="PCB Mounted", Dimensions=16mm, Price=0.5
U1: library part ATTINY85-20SU, "IC, 8BIT MCU, AVR TINY, 20MHZ, 8-SOIC", Case/Package=SOIC, Frequency=20MHz, Manufacturer="Microchip / Atmel", Max Operating Temperature=85°C, Max Supply Voltage=5.5V, Min Operating Temperature=-40°C, Min Supply Voltage=2.7V, Package Quantity=95, Supplier Part Number 1=1455164, Access Time=20us, ComponentLink1Description=https://datasheet.ciiva.com/1167/1698186-1167152.pdf?src-supplier=Newark, ComponentLink1URL=https://datasheet.ciiva.com/1167/1698186-1167152.pdf?src-supplier=Newark, ComponentLink2Description=https://datasheet.ciiva.com/15122/getdatasheetpartid-131914-15122511.pdf?src-supplier=Verical, ComponentLink2URL=https://datasheet.ciiva.com/15122/getdatasheetpartid-131914-15122511.pdf?src-supplier=Verical, ComponentLink3Description=https://datasheet.ciiva.com/26207/doc2586-26207573.pdf?src-supplier=Avnet+Europe, ComponentLink3URL=https://datasheet.ciiva.com/26207/doc2586-26207573.pdf?src-supplier=Avnet+Europe, ComponentLink4Description=https://datasheet.ciiva.com/28653/1698186-28653829.pdf?src-supplier=Element14, ComponentLink4URL=https://datasheet.ciiva.com/28653/1698186-28653829.pdf?src-supplier=Element14, ComponentLink5Description=https://datasheet.ciiva.com/3203/doc2586-3203150.pdf?src-supplier=Avnet, ComponentLink5URL=https://datasheet.ciiva.com/3203/doc2586-3203150.pdf?src-supplier=Avnet, Contact Plating=Tin, Core Architecture=AVR, Data Bus Width=8b, Density=8KB, Height=1.91mm, Interface=SPI, Lead Free="Lead Free", Length=5.35mm, Manufacturer Part Number=ATTINY85-20SU, Max Frequency=20MHz, Memory Size=8KB, Memory Type=FLASH, Mount="Surface Mount", Number of ADC Channels=4, Number of I2C Channels=1, Number of I/Os=6, Number of Pins=8, Number of Programmable I/O=6, Number of PWM Channels=6, Number of SPI Channels=1, Number of Timers/Counters=2, Number of UART Channels=1, Oscillator Type=Internal, Packaging=Rail/Tube, Peripherals="Brown-out Detect/Reset", Price=0.98, Pricing="1=0.972, 25=0.925, 100=0.894, 1000=0.862 (EUR)", Radiation Hardening=No, RAM Size=512B, REACH SVHC="No SVHC", RoHS=Yes, Stock=2172, Supplier 1=Farnell, Termination=SMD/SMT, Watchdog Timer=Yes, Width=5.4mm

## Via types
v1: diameter 0.7, hole 0.35, Top Layer to Bottom Layer, tented both sides, 146 vias
v2: diameter 0.7, hole 0.35, Top Layer to Bottom Layer, 58 vias
v3: diameter 0.889, hole 0.508, Top Layer to Bottom Layer, 2 vias

## Nets (pads, with @x,y where several pads share a name; then routed paths per layer and width w, separated by ;. In a path a pad name is that pad's centre, name@x,y a point inside that pad or via, vN(x,y) a via of type N, cw(c..) or ccw(c..) an arc to the next point about the centre after c; other vN are vias at no path point)
+5V: C7.1 C8.+ C9.1 REG1.1 U1.8 | length 11.8
  Top Layer w0.61: U1.8 C9.1 30.861,15.064 33.651,12.274 C8.+ C7.1 REG1.1
+9V: C1.+ C5.+ C6.1 C10.1 D1.1 DC.1 R1.1 REG1.2 REG2.2 | length 72.4
  Top Layer w0.61: DC.1 32.589,65.5 36.225,61.864 36.225,56.614 D1.1 40.829,52.01 C1.+ ; REG2.2 C10.1 37.361,47.889 R1.1 ; R1.1@37.4,47.9 C1.+ ; REG1.2 C6.1 C5.+ 44.67,15.03 40.875,18.825 v3(40.875,20.25) ; v3(40.85,44.425) 40.829,44.446 C1.+
  Bottom Layer w0.61: v3(40.85,44.425) 40.85,20.275 v3(40.875,20.25)
GND: C1.- C2.- C3.2 C4.- C5.- C6.2 C7.2 C8.- C9.2 C10.2 C11.2 C13.2 C16.- C17.- C19.2 C20.2 D1.2 D3.ANODE D4.P$1 D5.A D6.C D7.A D8.C DC.2 FSW.2 IC1.4 INPUT.S K2.3 K2.4 LED.2 MELLOW.B1 MELLOW.B2 MELLOW.B3 MODE.1 OUTPUT.S Q1.2 R3.1 R7.1 R14.1 R15.1 REG1.3 REG2.3 U1.4 VOL.1
  other v1: 43.45,4.95 22.7,5.925 7.493,7.396 13.792,7.396 20.091,7.396 26.975,7.396 32.69,7.396 45.288,7.396 51.587,7.396 38.989,9.775 20.967,10.275 48.214,10.8 50.185,12.274 25.727,12.499 31.35,13.05 7.493,13.696 13.792,13.696 48.214,13.696 23.875,13.8 37.242,15.024 42.242,15.024 32.547,15.818 35.575,15.818 39.742,16.225 18.775,16.4 34.067,17.75 7.493,19.995 13.792,19.995 26.391,19.995 32.69,19.995 38.989,19.995 45.288,19.995 51.587,19.995 45.288,23.67 26.65,25.3 33.824,25.3 7.493,26.294 12.888,26.294 17.21,26.294 38.989,26.294 45.288,26.294 51.587,26.294 20.091,27.394 23.05,27.394 42.275,29.45 48.775,29.45 55.4,29.725 23.3,31.775 3.825,31.973 6.887,31.973 14.567,32.569 12.019,32.593 20.091,32.593 26.391,32.593 31.875,32.593 38.989,32.593 45.288,32.593 50.325,33.45 5.327,33.925 15.35,34.332 18.4,34.332 16.875,36.65 42.275,37.175 49.375,37.175 20.091,38.892 23.3,38.892 26.391,38.892 32.69,38.892 38.989,38.892 45.896,39.425 3.825,40.297 6.909,40.297 48.231,40.975 11.478,41.178 14.567,41.178 5.325,42.359 45.871,42.525 18.6,42.575 23.3,42.7 29.515,42.7 34.595,42.7 11.842,43.624 39.5,44.425 42.275,44.425 14.567,44.925 9.113,45.575 23.85,46.075 29.515,46.075 34.595,46.075 45.871,46.325 16.349,46.482 18.191,47.315 21.15,47.864 26.2,47.864 48.231,47.9 24.095,49.439 45.871,49.45 31.5,49.491 12.384,50.419 34.02,50.639 24.095,51.453 7.493,51.491 20.091,51.491 26.391,51.491 38.989,51.491 51.587,51.491 33.08,52.539 35.05,52.539 42.05,53.25 13.792,53.507 34.07,54.01 25.158,54.352 20.091,56.7 34.07,57.556 43.675,57.556 7.493,57.79 13.792,57.79 26.391,57.79 51.587,57.79 33.08,59.039 35.05,59.039 20.091,59.15 38.925,59.675 34.07,60.524 31.091,60.702 7.493,64.089 13.792,64.089 20.091,64.089 26.391,64.089 38.989,64.089 45.288,64.089 51.587,64.089 7.493,70.388 13.792,70.388 20.091,70.388 26.391,70.388 32.69,70.388 38.989,70.388 45.288,70.388 51.587,70.388 13.792,76.688 20.091,76.688 26.391,76.688 32.69,76.688 38.989,76.688 45.288,76.688
  other v2: 1.194,1.097 7.493,1.097 13.792,1.097 20.091,1.097 26.391,1.097 32.69,1.097 38.989,1.097 45.288,1.097 51.587,1.097 57.887,1.097 1.194,7.396 57.887,7.396 1.194,13.696 57.887,13.696 1.194,19.995 57.887,19.995 1.194,26.294 57.887,26.294 1.194,32.593 57.887,32.593 1.194,38.892 57.887,38.892 1.194,45.192 57.887,45.192 1.194,51.491 57.887,51.491 1.194,57.79 57.887,57.79 1.194,64.089 57.887,64.089 1.194,70.388 57.887,70.388 1.194,76.688 7.493,76.688 51.587,76.688 57.887,76.688 7.493,82.987 13.792,82.987 20.091,82.987 26.391,82.987 32.69,82.987 38.989,82.987 45.288,82.987 51.587,82.987
INPUT: INPUT.T K1.6 | length 18.2
  Top Layer w0.254: v2(15.425,59.087) 15.425,59.075 16.516,57.984 K1.6
  Bottom Layer w0.254: INPUT.T 15.412,59.087 v2(15.425,59.087)
NetBRIGHT_1: BRIGHT.1 R4.2 | length 10.1
  Top Layer w0.254: R4.2 43.793,7.482 BRIGHT.1
NetBRIGHT_2: BRIGHT.2 BRIGHT.3 LED.1 | length 10.6
  Top Layer w0.254: BRIGHT.3 BRIGHT.2 48.795,2.484 LED.1
NetC11_1: C11.1 D2.1 K1.1 REG2.1 | length 6.6
  Top Layer w0.61: K1.1 28.986,50.503 D2.1 C11.1 REG2.1
NetC12_1: C12.1 R8.1 R9.1 | length 3.2
  Top Layer w0.254: R8.1 R9.1 C12.1
NetC13_1: C13.1 IC1.3 R9.2 | length 3.4
  Top Layer w0.254: R9.2 7.325,46.525 C13.1 9.113,47.875 IC1.3
NetC14_1: C14.1 IC1.8 | length 2.7
  Top Layer w0.254: C14.1 12.861,52.125 IC1.8
NetC14_2: C14.2 IC1.1 | length 2.7
  Top Layer w0.254: IC1.1 10.823,52.125 C14.2
NetC15_1: C15.1 GAIN.1 IC1.6 R12.1 | length 40.7
  Top Layer w0.254: IC1.6 v2(12.6,47.879) C15.1 13.225,44.3 13.225,32.3 21.775,23.75 R12.1
  Bottom Layer w0.254: v2(12.6,47.879) 12.6,48.675 16.135,52.21 GAIN.1
NetC15_2: C15.2 GAIN.2 GAIN.3 IC1.2 R10.2 R11.2 | length 26.9